# Altium PCB H-bridge.PcbDoc
Units mil, origin at the board's own origin, x right, y up, seen from the top; angles counter-clockwise.
Board outline 1715 x 2495 mil, 2 copper layers (Top Layer, Bottom Layer); 49 components, 26 nets, 126 pads, 356 vias.
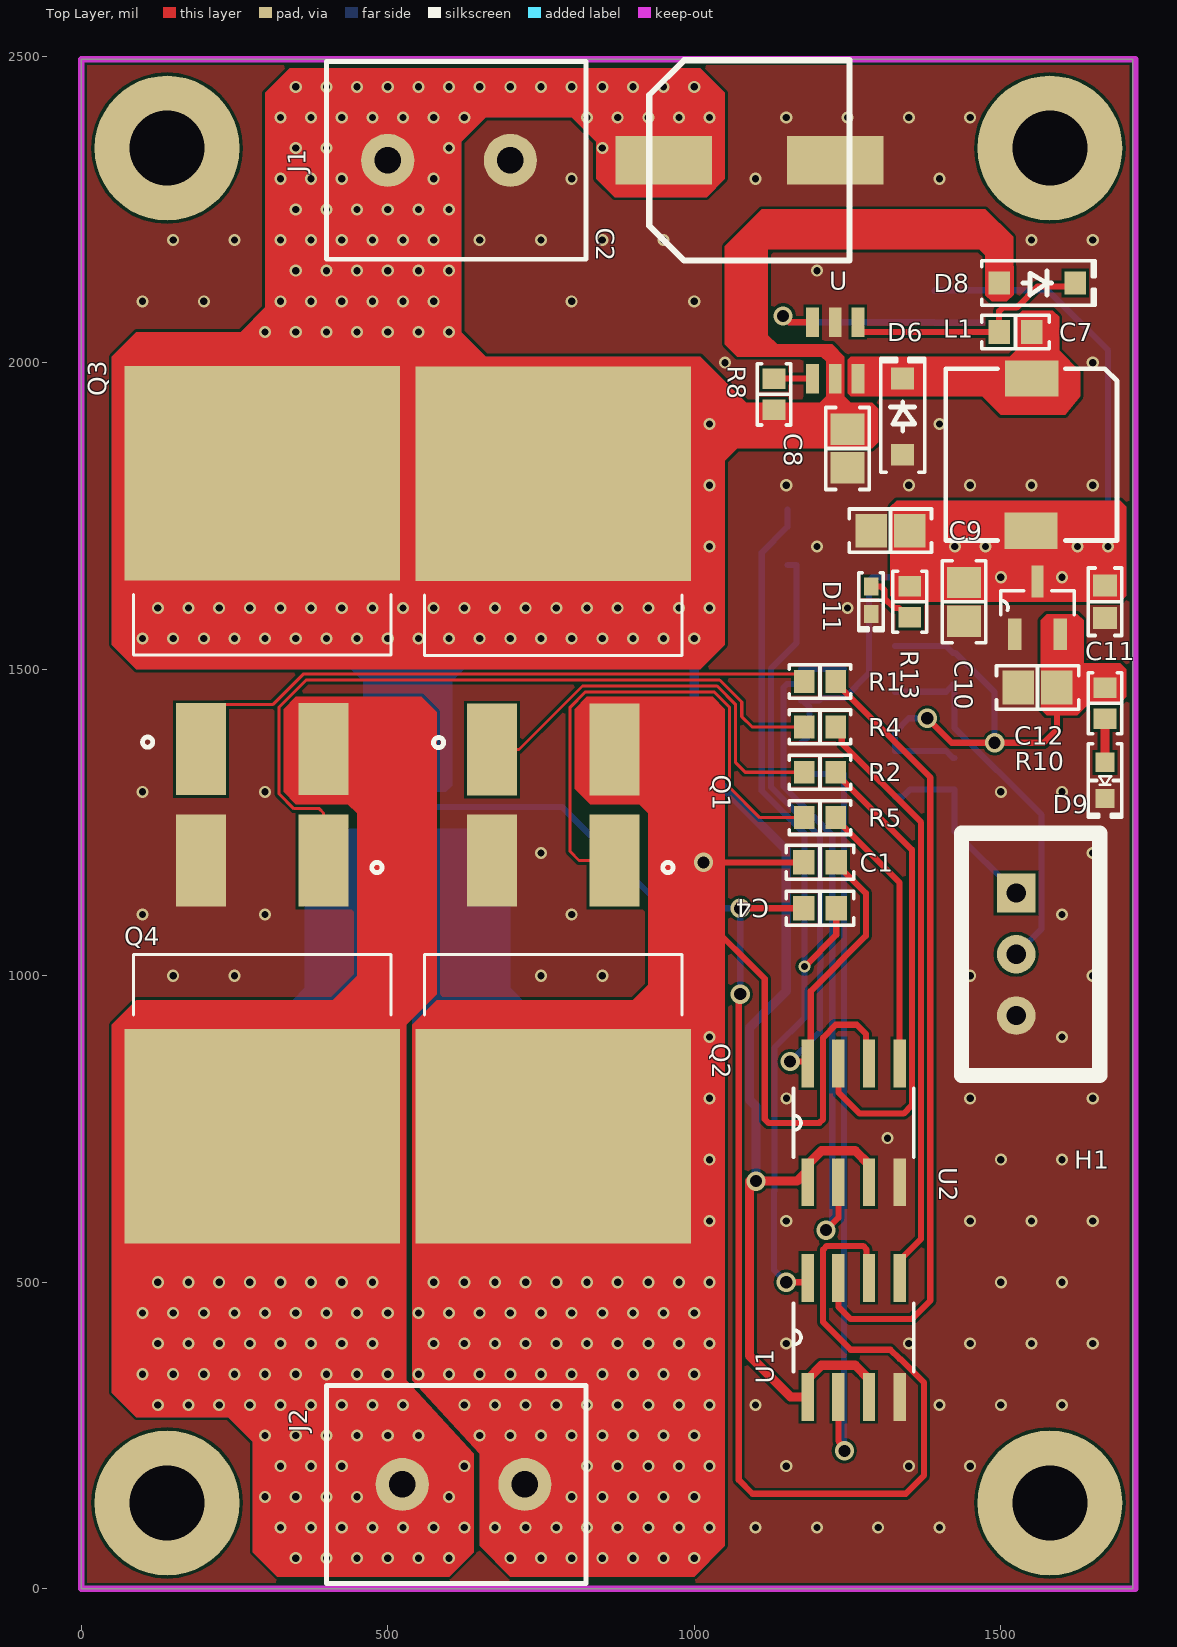
[diagram p0: Top Layer view]
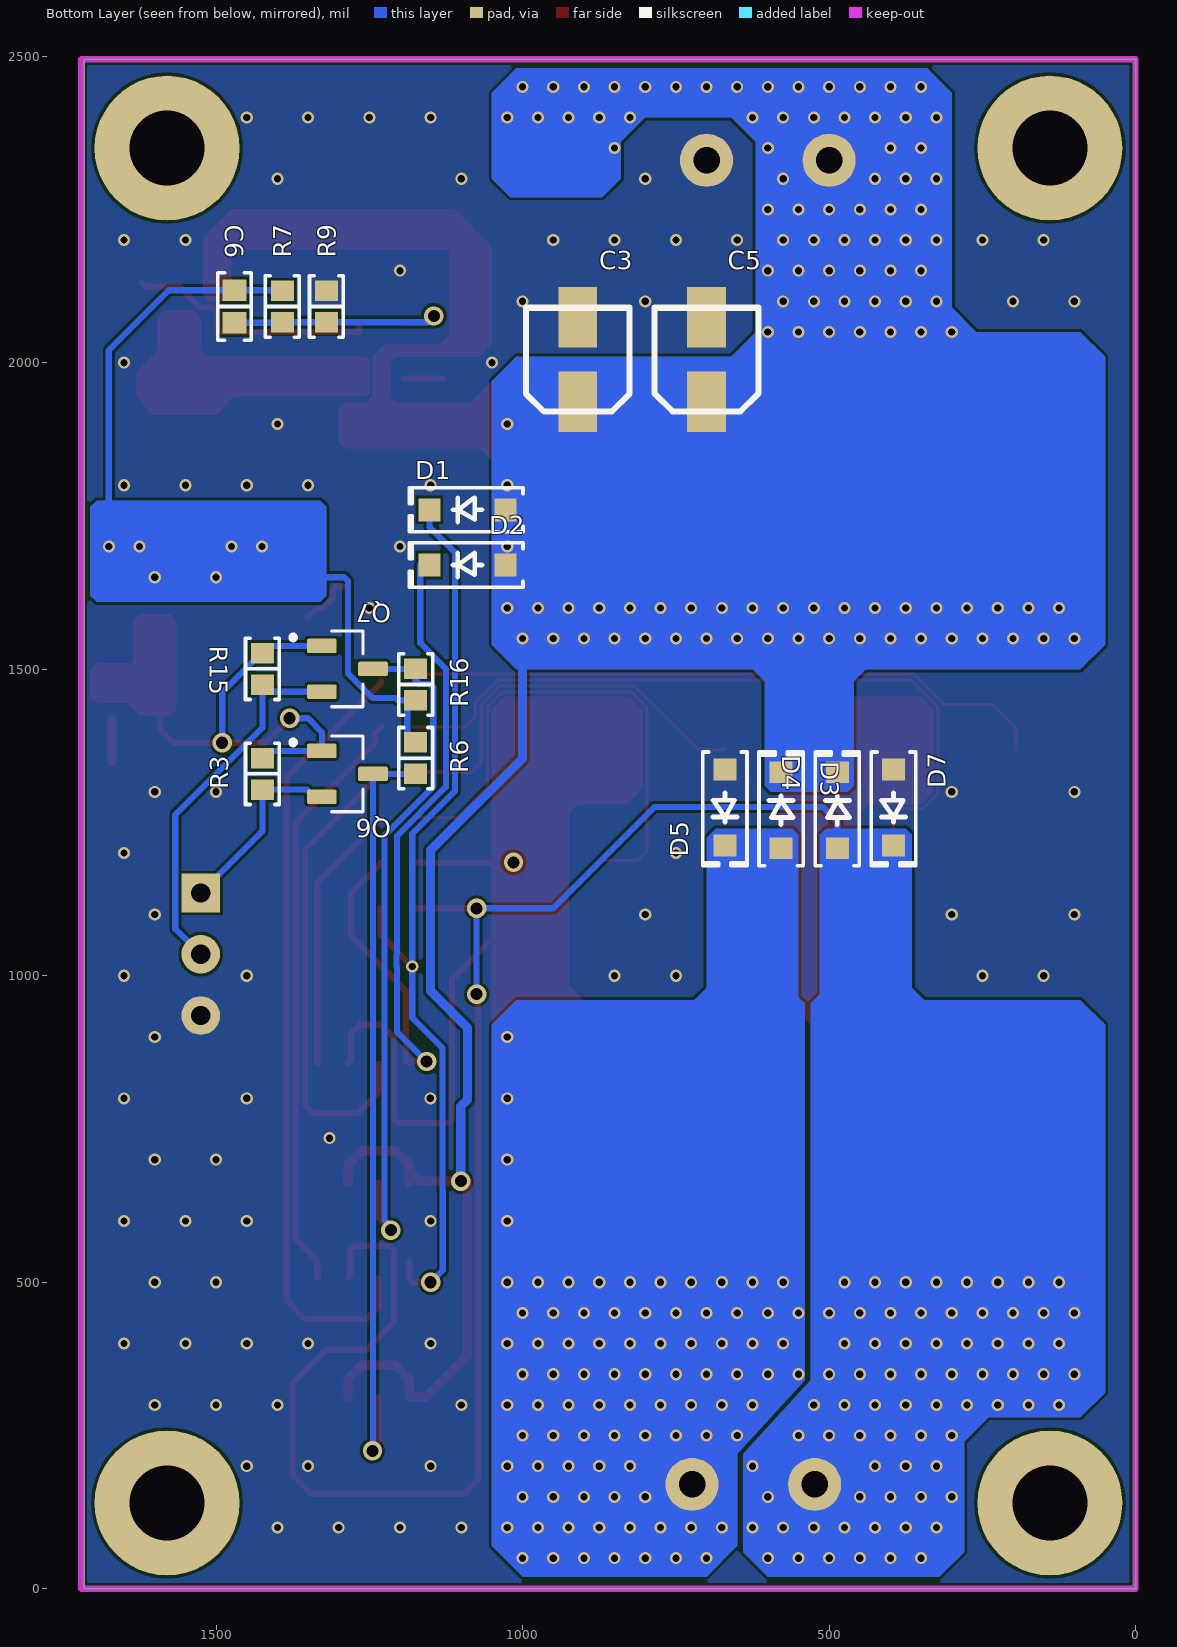
[diagram p1: Bottom Layer view, seen from below]
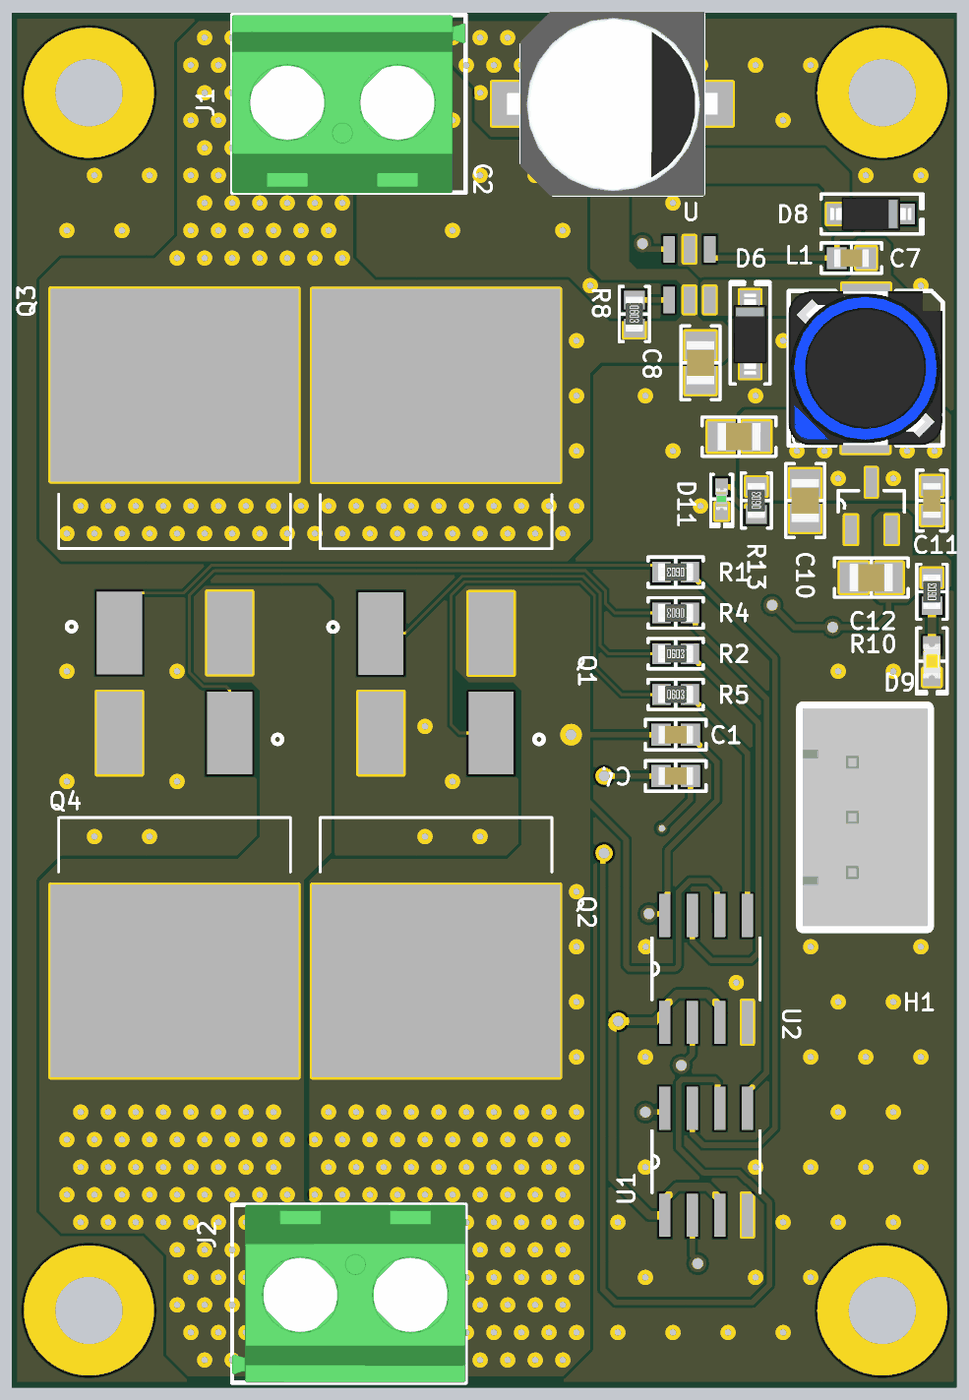
[diagram p2: 3D render of the assembled board from above, using the file's embedded part models]
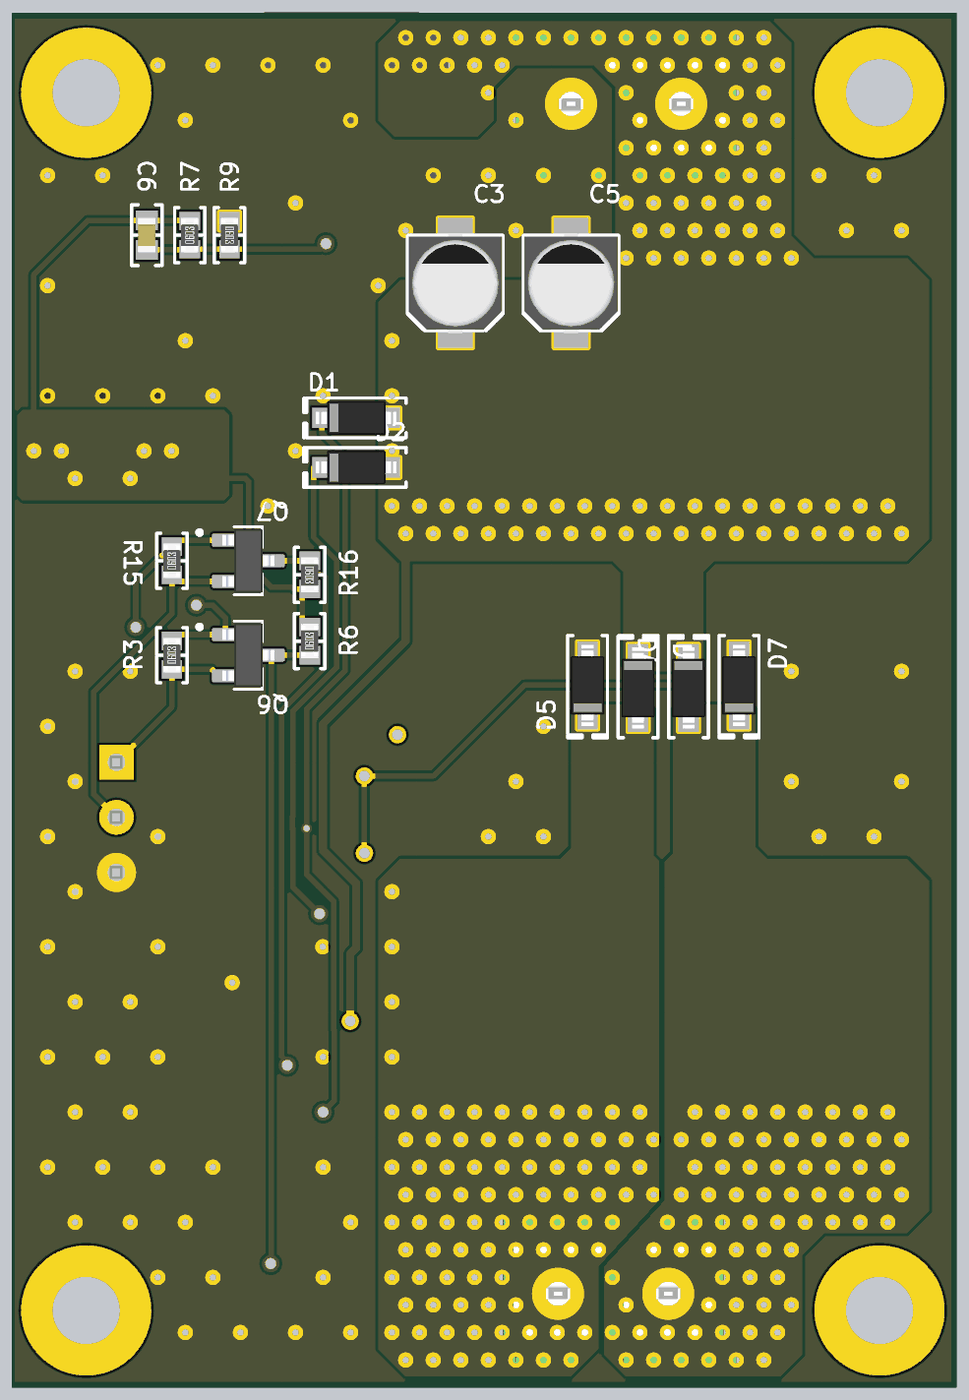
[diagram p3: 3D render of the assembled board from below, using the file's embedded part models]

## Layer stack, top to bottom
Top Solder: solder mask 0.4, Solder Resist, Dk 3.5
Top Layer: signal copper 1.4
Dielectric 1: dielectric 12.6, FR-4, Dk 4.8
Bottom Layer: signal copper 1.4
Bottom Solder: solder mask 0.4, Solder Resist, Dk 3.5

## Board outline
0,0 0,2495 1715,2495 1715,0

## Design rules (kind name [scope] priority, off if disabled: settings)
Clearance [All] p1: gap=5 ignorepadtopadclearanceinfootprint=FALSE
PolygonConnect PolygonConnect_1 [All vs IsNamedPolygon('GND_L01_P000') Or IsNamedPolygon('GND_L02_P001')] p1: connectstyle=Direct reliefconductorwidth=10 reliefentries=4 polygonreliefangle="90 Angle" airgapwidth=10
PolygonConnect [All] p2: connectstyle=Relief reliefconductorwidth=10 reliefentries=4 polygonreliefangle="90 Angle" airgapwidth=10
RoutingVias [All] p1: holewidth=11.81 width=19.68 viastyle="Through Hole" minholewidth=11.81 minwidth=19.68 maxholewidth=19.68 maxwidth=31.5
SolderMaskExpansion [All] p1: expansion=4 istentingtop=FALSE
Width [All] p1: maxlimit=50 minlimit=5 preferedwidth=10 minimp=50.000000 maximp=50.000000 favimp=50.000000
30 further rules are at their usual default settings.

## Classes and differential pairs
component class Power: C6 C7 C8 C9 C10 C11 C12 D6 D8 D9 D11 L1 R7 R8 R9 R10 R13 U
component class H_Bridge_Mosate: A C1 C2 C3 C4 C5 D1 D2 D3 D4 D5 D7 H1 J1 J2 Q1 Q2 Q3 Q4 Q6 Q7 R1 R2 R3 R4 R5 R6 R15 R16 U1 U2

## Components (designator, comment, footprint, x,y, rotation, side; value= is the part's Value field where it differs from the comment)
C1 "1 µF" "CAP 0603_1608" 1205,1185 r0 top
C2 "220uF" "tu nhom 8 (f)" 1090,2330 r0 top
C3 "4.7uF" "tu nhom 4 (b)" 910,2005 r90 bottom
C4 "1 µF" "CAP 0603_1608" 1205,1110 r0 top
C5 "4.7uF" "tu nhom 4 (b)" 700,2005 r90 bottom
C6 "10000 pF" "CAP 0603_1608" 1470,2091.59 r90 bottom
C7 "10000 pF" "CAP 0603_1608" 1523.92,2050 r180 top
C8 "10 µF" "CAP 0805_2012" 1250,1860 r90 top
C9 "22 µF" "CAP 0805_2012" 1320,1725.97 r0 top
C10 "10 µF" "CAP 0805_2012" 1440,1610 r90 top
C11 "0.1µF" "CAP 0603_1608" 1670,1610 r90 top
C12 "10 µF" "CAP 0805_2012" 1559.95,1470 r0 top
D1 "1N5819HW-7-F" SOD-123 1090,1760 r0 bottom
D2 "1N5819HW-7-F" SOD-123 1090,1670 r0 bottom
D3 "1N5819HW-7-F" SOD-123 578.33,1270 r90 bottom
D4 "1N5819HW-7-F" SOD-123 486.67,1270 r90 bottom
D5 "1N5819HW-7-F" SOD-123 670,1274.45 r270 bottom
D6 "1N5819HW-7-F" SOD-123 1340,1911.99 r90 top
D7 "1N5819HW-7-F" SOD-123 395,1274.45 r270 bottom
D8 "1N5819HW-7-F" SOD-123 1559.35,2130 r0 top
D9 "Yellow" "LED 0603_1608 YELLOW" 1670,1318.49 r270 top
D11 "Green" "LED 0402_1005 GREEN" 1288.5,1612.5 r270 top
H1 "Header 3P 2.54 Duc Thang" XH2.54M-3 1525,1135 r270 top
J1 "282837-2" "TE 282837-2" 600,2330 r0 top
J2 "282837-2" "TE 282837-2" 623.61,170.28 r180 top
L1 "10µH" "TDK SLF7032" 1550,1849.98 r270 top
Q1 "IRF3205SPBF" TRANS_IRF3205SPBF 770,1650 r0 top
Q2 "IRF3205SPBF" TRANS_IRF3205SPBF 770,906.84 r180 top
Q3 "IRF3205SPBF" TRANS_IRF3205SPBF 295.37,1650.73 r0 top
Q4 "IRF3205SPBF" TRANS_IRF3205SPBF 295.37,906.84 r180 top
Q6 "BSS138" SOT95P240X111-3N 1285.73,1329.31 r180 bottom
Q7 "BSS138" SOT95P240X111-3N 1285.73,1500.59 r180 bottom
R1 "10 Ohms" "RES 0603_1608" 1205,1480 r180 top
R2 "10 Ohms" "RES 0603_1608" 1205,1331.96 r0 top
R3 "10 kOhms" "RES 0603_1608" 1424.38,1329.31 r90 bottom
R4 "10 Ohms" "RES 0603_1608" 1205,1405.98 r180 top
R5 "10 Ohms" "RES 0603_1608" 1205,1257.94 r0 top
R6 "10 kOhms" "RES 0603_1608" 1174.38,1354.9 r90 bottom
R7 "52.3 kOhms" "RES 0603_1608" 1392,2091.59 r90 bottom
R8 "100 kOhms" "RES 0603_1608" 1130,1948.41 r270 top
R9 "10 kOhms" "RES 0603_1608" 1320,2091.59 r270 bottom
R10 "680 Ohms" "RES 0603_1608" 1670,1444.41 r90 top
R13 "1 kOhms" "RES 0603_1608" 1351.5,1610 r90 top
R15 "10 kOhms" "RES 0603_1608" 1424.38,1500.59 r90 bottom
R16 "10 kOhms" "RES 0603_1608" 1174.38,1475 r270 bottom
U "LM2734YMK" SOT95P285X100-6N 1230,2020 r270 top
U1 "IR2104SPBF" SOIC127P600X175-8N 1260,410 r90 top
U2 "IR2104SPBF" SOIC127P600X175-8N 1260,760 r90 top
? "MCP1700T-3302E/TT" SOT95P237X112-3N 1560,1600 r90 top

## Footprints (in the part's own frame and the unit in brackets; to place one, negate y for a bottom-side part, rotate by r counter-clockwise, add the part's x,y. Pads: shape width x height; smd on the part's side, far side on the other; paste and mask are expansions set on the pad)
"CAP 0603_1608" [mm] "Chip Capacitor, 2-Leads, Body 1.60x0.80mm, IPC Medium Density"
  rect 0.9x1 smd: 1(-0.675,0) 2(0.675,0)
  silkscreen extent -1.4,-0.7 1.4,0.7, body extent -0.8,-0.41 0.8,0.41, height 0.82
"CAP 0805_2012" [mm] "Chip Capacitor, 2-Leads, Body 2.00x1.20mm, IPC Medium Density"
  rect 1.3x1.4 smd: 1(-0.8,0) 2(0.8,0)
  silkscreen extent -1.7,-0.9 1.7,0.9, body extent -1,-0.64 1,0.64, height 1.26
"LED 0402_1005 GREEN" [mm] "Chip Diode, 2-Leads, Body 1.00x0.50mm, IPC Medium Density"
  rect 0.75x0.6 smd: 1(-0.575,0) 2(0.575,0)
  silkscreen extent -1.14,-0.51 1.27,0.51, body extent -0.5,-0.25 0.5,0.25, height 0.21
"LED 0603_1608 YELLOW" [mm] "Chip Diode, 2-Leads, Body 1.60x0.80mm, IPC Medium Density"
  rect 0.8x0.8 smd: 1(-0.75,0) 2(0.75,0)
  silkscreen extent -1.52,-0.7 1.52,0.7, body extent -0.8,-0.4 0.8,0.4, height 0.53
"RES 0603_1608" [mm] "Chip Resistor, 2-Leads, Body 1.60x0.80mm, IPC Medium Density"
  rect 0.85x0.95 smd: 1(-0.65,0) 2(0.65,0)
  silkscreen extent -1.27,-0.7 1.27,0.7, body extent -0.8,-0.4 0.8,0.4, height 0.45
SOD-123 [mm] "SOD, 2-Leads, Body 1.55x3.70mm, IPC Medium Density"
  rect 0.9x0.95 smd: 1(-1.575,0) 2(1.575,0)
  silkscreen extent -2.3,-0.92 2.41,0.92, body extent -1.86,-0.78 1.86,0.77, height 1.35
SOIC127P600X175-8N [mil]
  rect 78x20 smd: 1(-97,75) 2(-97,25) 3(-97,-25) 4(-97,-75) 5(97,-75) 6(97,-25) 7(97,25) 8(97,75)
  silkscreen extent -56,-98 56,98
SOT95P237X112-3N [mil]
  rect 52x22 smd: 1(-43,37) 2(-43,-37)
  rect 52x20 smd: 3(43,0)
  silkscreen extent -11,-60 28,60
SOT95P240X111-3N [mm]
  rrect25% 1.23x0.6 smd: 1(-1.06,0.95) 2(-1.06,-0.95) 3(1.06,0)
  silkscreen extent -2.35,-1.57 0.65,1.57, body extent -1.2,-1.46 1.2,1.46, height 1.2
SOT95P285X100-6N [mil]
  rect 48x21 smd: 1(-46,37) 2(-46,0) 3(-46,-37) 4(46,-37) 5(46,0) 6(46,37)
"TDK SLF7032" [mm] "Power Inductor, 2-Leads, TDK, SLF7032T-221MR29-2PF"
  rect 1.5x2.2 smd: 1(-3.15,0.012) 2(3.15,-0.012)
  silkscreen extent -3.56,-3.55 3.56,3.55, body extent -3.56,-3.56 3.56,3.54, height 3.39
"TE 282837-2" [mm] "Wire to Board Terminal Block Horizontal with Board, 2 Postions, Body 10.76x8.2 mm, Pitch 5.08mm"
  round 2.2 hole 1.1: 1(-2.54,0) 2(2.54,0)
  silkscreen extent -5.08,-4.1 5.68,4.1, body extent -5.08,-4.1 5.68,4.1, height 10.3
TRANS_IRF3205SPBF [mil]
  rect 81.89x150 smd: 1(-100,-281.1) 3(100,-281.1)
  rect 450x350 smd: 2(0,168.9)
  silkscreen extent -210,-278 210,-29
"tu nhom 4 (b)" [mm]
  rect 2.5x1.6 smd: 1(-1.75,0) 2(1.75,0)
  silkscreen extent -2.15,-2.15 2.15,2.15, body extent -2.31,-2.15 2.29,2.15, height 3.91
"tu nhom 8 (f)" [mm]
  rect 4x2 smd: 1(-3.55,0) 2(3.55,0)
  silkscreen extent -4.15,-4.15 4.15,4.15, body extent -4.85,-4.25 4.85,4.25, height 10.5
XH2.54M-3 [mm]
  rect 1.6x1.6 hole 0.8: 1(0,0)
  round 1.6 hole 0.8: 2(2.54,0) 3(5.08,0)
  silkscreen extent -2.48,-2.26 7.56,3.46, body extent -2.48,-2.26 7.56,3.48, height 6.91

## Part data
C1 C4: library part GCG188L8EE105KA07D, "CAP CER 1UF 16V X8L 0603", Device Package="0603 (1608 Metric)", Manufacturer="Murata Electronics", Operating Temperature="-55°C ~ 150°C", Ratings=AEC-Q200, Supplier Part Number 1=490-GCG188L8EE105KA07DCT-ND, Temperature Coefficient=X8L, Tolerance=±10%, Voltage - Rated=16V, Applications=Automotive, Capacitance="1 µF", componentlink2description="DigiKey Link", componentlink2url=https://www.digikey.com/en/products/detail/murata-electronics/GCG188L8EE105KA07D/10695125, Features="Epoxy Mountable", lastupdated="2/9/2024 8:09:54 PM", Lifecycle Status=Active, Minimum Order=1, Mounting Type="Surface Mount, MLCC", Package / Case="0603 (1608 Metric)", packaging=TapeAndReel, Part Number=GCG188L8EE105KA07D, Part Status=Active, partid=46174, Price=0.04, series=GCG, Size / Dimension="0.063\" L x 0.031\" W (1.60mm x 0.80mm)", Supplier 1=DigiKey, Thickness (Max)="0.035\" (0.90mm)"
C2: library part "Tu Nhom 220uF 25V", "Dán", Chung_Loai=Dán, Don_Vi=Con, Ma_Hang=MH002221, So_Chan=2, Ten_Linh_Kien="Tụ Nhôm 220uF 25V"
C3 C5: library part "Tu Nhom 4.7uF 25V", "Dán", Chung_Loai=Dán, Don_Vi=Con, Ma_Hang=MH003790, So_Chan=2, Ten_Linh_Kien="Tụ Nhôm 4.7uF 25V 4x4.5MM"
C6 C7: library part C0603C103K4RECAUTO, "CAP CER 0603 10NF 16V X7R 10%", Device Package="0603 (1608 Metric)", Manufacturer=KEMET, Operating Temperature="-55°C ~ 125°C", Ratings=AEC-Q200, Supplier Part Number 1=399-17880-1-ND, Temperature Coefficient=X7R, Tolerance=±10%, Voltage - Rated=16V, Applications="Automotive, ESD Protection", Capacitance="10000 pF", componentlink1description=Datasheet, componentlink1url=https://api.kemet.com/component-edge/download/datasheet/C0603C103K4RECAUTO.pdf, componentlink2description="DigiKey Link", componentlink2url=https://www.digikey.com/en/products/detail/kemet/C0603C103K4RECAUTO/8640474, lastupdated="2/9/2024 8:10:22 PM", Lifecycle Status=Active, Minimum Order=1, Mounting Type="Surface Mount, MLCC", Package / Case="0603 (1608 Metric)", packaging=TapeAndReel, Part Number=C0603C103K4RECAUTO, Part Status=Active, partid=8251, Price=0.01, series="ESD SMD Auto X7R", Size / Dimension="0.063\" L x 0.031\" W (1.60mm x 0.80mm)", Supplier 1=DigiKey, Thickness (Max)="0.034\" (0.87mm)"
C8: library part CL21X106KAYNNNE, "CAP CER 10UF 25V X6S 0805", Device Package="0805 (2012 Metric)", Manufacturer="Samsung Electro-Mechanics", Operating Temperature="-55°C ~ 105°C", Supplier Part Number 1=1276-6698-1-ND, Temperature Coefficient=X6S, Tolerance=±10%, Voltage - Rated=25V, Applications="General Purpose", Capacitance="10 µF", componentlink1description=Datasheet, componentlink1url=http://www.samsungsem.com/kr/support/product-search/mlcc/CL21X106KAYNNNE.jsp, componentlink2description="DigiKey Link", componentlink2url=https://www.digikey.com/en/products/detail/samsung-electro-mechanics/CL21X106KAYNNNE/5961182, lastupdated="2/9/2024 8:16:03 PM", Lifecycle Status=Active, Minimum Order=1, Mounting Type="Surface Mount, MLCC", Package / Case="0805 (2012 Metric)", packaging=TapeAndReel, Part Number=CL21X106KAYNNNE, Part Status=Active, partid=4781, Price=0.04, series=CL, Size / Dimension="0.079\" L x 0.049\" W (2.00mm x 1.25mm)", Supplier 1=DigiKey, Thickness (Max)="0.057\" (1.45mm)"
C9: library part CL21A226KQQNNNE, "CAP CER 22UF 6.3V X5R 0805", Device Package="0805 (2012 Metric)", Manufacturer="Samsung Electro-Mechanics", Operating Temperature="-55°C ~ 85°C", Supplier Part Number 1=1276-2907-1-ND, Temperature Coefficient=X5R, Tolerance=±10%, Voltage - Rated=6.3V, Applications="General Purpose", Capacitance="22 µF", componentlink1description=Datasheet, componentlink1url=http://www.samsungsem.com/kr/support/product-search/mlcc/CL21A226KQQNNNE.jsp, componentlink2description="DigiKey Link", componentlink2url=https://www.digikey.com/en/products/detail/samsung-electro-mechanics/CL21A226KQQNNNE/3888565, lastupdated="2/9/2024 8:16:07 PM", Lifecycle Status=Active, Minimum Order=1, Mounting Type="Surface Mount, MLCC", Package / Case="0805 (2012 Metric)", packaging=TapeAndReel, Part Number=CL21A226KQQNNNE, Part Status=Active, partid=3051, Price=0.03, series=CL, Size / Dimension="0.079\" L x 0.049\" W (2.00mm x 1.25mm)", Supplier 1=DigiKey, Thickness (Max)="0.055\" (1.40mm)"
C10 C12: library part C2012X6S1C106K125AC, "CAP CER 10UF 16V X6S 0805", Device Package="0805 (2012 Metric)", Manufacturer="TDK Corporation", Operating Temperature="-55°C ~ 105°C", Supplier Part Number 1=445-7611-1-ND, Temperature Coefficient=X6S, Tolerance=±10%, Voltage - Rated=16V, Applications="General Purpose", Capacitance="10 µF", componentlink1description=Datasheet, componentlink1url=https://product.tdk.com/info/en/catalog/datasheets/mlcc_commercial_general_en.pdf?ref_disty=digikey, componentlink2description="DigiKey Link", componentlink2url=https://www.digikey.com/en/products/detail/tdk-corporation/C2012X6S1C106K125AC/2733046, Features="Low ESL", lastupdated="2/9/2024 8:16:08 PM", Lifecycle Status=Active, Minimum Order=1, Mounting Type="Surface Mount, MLCC", Package / Case="0805 (2012 Metric)", packaging=TapeAndReel, Part Number=C2012X6S1C106K125AC, Part Status=Active, partid=2995, Price=0.06, series=C, Size / Dimension="0.079\" L x 0.049\" W (2.00mm x 1.25mm)", Supplier 1=DigiKey, Thickness (Max)="0.057\" (1.45mm)"
C11: library part 0603YC104K4T4A, "CAP CER 0.1UF 16V X7R 0603", Device Package="0603 (1608 Metric)", Manufacturer="AVX Corporation", Operating Temperature="-55°C ~ 125°C", Ratings=AEC-Q200, Supplier Part Number 1=478-9382-1-ND, Temperature Coefficient=X7R, Tolerance=±10%, Voltage - Rated=16V, Applications=Automotive, Capacitance=0.1µF, componentlink1description=Datasheet, componentlink1url=http://datasheets.avx.com/AutoMLCC.pdf, componentlink2description="DigiKey Link", componentlink2url=http://digikey.com/product-detail/en/avx-corporation/0603YC104K4T4A/478-9382-1-ND/4901449, lastupdated="9/2/2020 1:03:04 AM", Lifecycle Status=Active, Minimum Order=1, Mounting Type="Surface Mount, MLCC", Package / Case="0603 (1608 Metric)", packaging=TapeAndReel, Part Number=0603YC104K4T4A, Part Status=Active, partid=17140, Price=0.02, series=-, Size / Dimension="0.063\" L x 0.032\" W (1.60mm x 0.81mm)", Supplier 1=DigiKey, Thickness (Max)="0.035\" (0.90mm)"
D1 D2 D3 D4 D5 D6 D7 D8: "DIODE SCHOTTKY 40V 1A SOD123", Capacitance @ Vr, F="60pF @ 4V, 1MHz", Current - Average Rectified (Io)=1A, Current - Reverse Leakage @ Vr="1 mA @ 40 V", Manufacturer="Diodes Incorporated", Operating Temperature - Junction="-65°C ~ 125°C", Package / Case=SOD-123, Supplier Part Number 1=1N5819HW-FDICT-ND, Voltage - DC Reverse (Vr) (Max)="40 V", Voltage - Forward (Vf) (Max) @ If="450 mV @ 1 A", componentlink1description=Datasheet, componentlink1url=https://www.diodes.com/assets/Datasheets/ds30217.pdf, componentlink2description="DigiKey Link", componentlink2url=https://www.digikey.com/en/products/detail/diodes-incorporated/1N5819HW-7-F/814970, Diode Type=Schottky, lastupdated="6/3/2024 7:54:46 PM", Lifecycle Status=Active, Minimum Order=1, Mounting Type="Surface Mount", packaging=TapeAndReel, Part Number=1N5819HW-7-F, Part Status=Active, partid=2212, Price=0.05, series=-, Speed="Fast Recovery =< 500ns, > 200mA (Io)", Supplier 1=DigiKey, Supplier Device Package=SOD-123
D9: library part IN-S63AT5Y, "LED YELLOW CLEAR 0603 SMD", Current - Test=5mA, Device Package="0603 (1608 Metric)", Lens Color=Clear, Manufacturer=Inolux, Millicandela Rating=35mcd, Supplier Device Package=0603, Supplier Part Number 1=1830-1066-1-ND, Voltage - Forward (Vf) (Typ)=2V, Color=Yellow, componentlink1description=Datasheet, componentlink1url=http://www.inolux-corp.com/datasheet/SMDLED/Mono%20Color%20Top%20View/IN-S63AT%20Series_V1.1.pdf, componentlink2description="DigiKey Link", componentlink2url=https://www.digikey.com/en/products/detail/inolux/IN-S63AT5Y/7604932, Configuration=Standard, Height (Max)=0.40mm, lastupdated="6/3/2024 8:01:09 PM", Lens Size="1.15mm x 0.80mm", Lens Style="Rectangle with Flat Top", Lens Transparency=Clear, Lifecycle Status=Active, Minimum Order=1, Mounting Type="Surface Mount", Package / Case="0603 (1608 Metric)", packaging=TapeAndReel, Part Number=IN-S63AT5Y, Part Status=Active, partid=143, Price=0.03, series=IN-S63AT, Size / Dimension="1.60mm L x 0.80mm W", Supplier 1=DigiKey, Viewing Angle=120°, Wavelength - Dominant=589nm, Wavelength - Peak=593nm
D11: library part QBLP595-AG15-2897, "LED GREEN CLEAR 0402 SMD", Current - Test=5mA, Device Package="0402 (1005 Metric)", Lens Color=Colorless, Manufacturer="QT Brightek (QTB)", Millicandela Rating=16.5mcd, Supplier Device Package=0402, Supplier Part Number 1=1516-QBLP595-AG15-2897CT-ND, Voltage - Forward (Vf) (Typ)=1.9V, Color=Green, componentlink1description=Datasheet, componentlink1url=https://www.qt-brightek.com/datasheet/QBLP595-AG15-2897.pdf, componentlink2description="DigiKey Link", componentlink2url=https://www.digikey.com/en/products/detail/qt-brightek-qtb/QBLP595-AG15-2897/17049386, Configuration=Standard, Height (Max)=0.60mm, lastupdated="6/3/2024 7:58:13 PM", Lens Size="0.70mm x 0.50mm", Lens Style="Rectangle with Flat Top", Lens Transparency=Clear, Lifecycle Status=Active, Minimum Order=1, Mounting Type="Surface Mount", Package / Case="0402 (1005 Metric)", packaging=TapeAndReel, Part Number=QBLP595-AG15-2897, Part Status=Active, partid=1262, Price=0.04, series=QBLP595, Size / Dimension="1.00mm L x 0.50mm W", Supplier 1=DigiKey, Viewing Angle=140°, Wavelength - Dominant=570nm
H1: "Cắm", Chung_Loai=Cắm, Don_Vi=Con, Ma_Hang=MH001292, Ten_Linh_Kien="Header 3P XH2.54-3P Đực Thẳng"
J1 J2: "TERM BLK 2P SIDE ENT 5.08MM PCB", Color=Green, Current="13.5 A", Manufacturer="TE Connectivity AMP Connectors", Supplier Part Number 1=A113320-ND, Voltage="300 V", componentlink1description=Datasheet, componentlink1url=https://www.te.com/commerce/DocumentDelivery/DDEController?Action=srchrtrv&DocNm=282837&DocType=Customer+Drawing&DocLang=English, componentlink2description="DigiKey Link", componentlink2url=https://www.digikey.com/en/products/detail/te-connectivity-amp-connectors/282837-2/2187973, Features="Interlocking (Side)", lastupdated="6/21/2022 3:00:23 PM", Lifecycle Status=Active, Mating Orientation="Horizontal with Board", Minimum Order=1, Mounting Type="Through Hole", Number of Levels=1, packaging=Tray, Part Number=282837-2, Part Status=Active, Pitch="0.200\" (5.08mm)", Positions Per Level=2, Price=0.31, series=Buchanan, Supplier 1=DigiKey, Wire Gauge="16-28 AWG", Wire Termination="Screw - Rising Cage Clamp"
L1: library part SLF7032T-100M1R4-2PF, "FIXED IND 10UH 1.4A 63.6 MOHM", Current Rating (Amps)=1.4A, DC Resistance (DCR)="63.6mOhm Max", Device Package=Nonstandard, Inductance Frequency - Test=100kHz, Manufacturer="TDK Corporation", Operating Temperature="-40°C ~ 105°C", Supplier Part Number 1=445-1998-1-ND, Tolerance=±20%, componentlink1description=Datasheet, componentlink1url=//media.digikey.com/pdf/Data%20Sheets/TDK%20PDFs/SLF7032_Type.pdf, componentlink2description="DigiKey Link", componentlink2url=http://digikey.com/product-detail/en/tdk-corporation/SLF7032T-100M1R4-2PF/445-1998-1-ND/755405, Height - Seated (Max)="0.134\" (3.40mm)", Inductance=10µH, lastupdated="9/2/2020 1:30:24 AM", Lifecycle Status=Active, Material - Core=Ferrite, Minimum Order=1, Mounting Type="Surface Mount", Package / Case=Nonstandard, packaging=TapeAndReel, Part Number=SLF7032T-100M1R4-2PF, Part Status=Active, partid=3677, Price=0.43, series=SLF, Shielding=Shielded, Size / Dimension="0.276\" L x 0.276\" W (7.00mm x 7.00mm)", Supplier 1=DigiKey, Type=Wirewound
Q1 Q2 Q3 Q4: "RoHS Compliant", Package="D2PAK Infineon", Availability=Unavailable, MF="Infineon Technologies", MP=IRF3205SPBF, Price=None, SnapEDA_Link=https://www.snapeda.com/parts/IRF3205SPBF/Infineon%20Technologies/view-part/576468/?ref=snap
Q6 Q7: "N-Channel 50 V 220mA (Ta) 350mW (Ta) Surface Mount SOT-23-3", Package="SOT-23-3 Motorola", Check_prices=https://www.snapeda.com/parts/BSS138/Onsemi/view-part/?ref=eda, MF=onsemi, MP=BSS138, SnapEDA_Link=https://www.snapeda.com/parts/BSS138/Onsemi/view-part/?ref=snap
R1 R2 R4 R5: library part ERJ-UP3F10R0V, "RES 10 OHM 1% 1/4W 0603", Device Package="0603 (1608 Metric)", Manufacturer="Panasonic Electronic Components", Operating Temperature="-55°C ~ 155°C", Power (Watts)="0.25W, 1/4W", Ratings=AEC-Q200, Supplier Device Package=0603, Supplier Part Number 1=10-ERJ-UP3F10R0VCT-ND, Temperature Coefficient=±100ppm/°C, Tolerance=±1%, componentlink1description=Datasheet, componentlink1url=https://b2b-api.panasonic.eu/file_stream/pids/fileversion/4484, componentlink2description="DigiKey Link", componentlink2url=https://www.digikey.com/en/products/detail/panasonic-electronic-components/ERJ-UP3F10R0V/12092098, Composition="Thick Film", Features="Anti-Sulfur, Automotive AEC-Q200, Pulse Withstanding", Height - Seated (Max)="0.022\" (0.55mm)", lastupdated="2/9/2024 8:41:13 PM", Lifecycle Status=Active, Minimum Order=1, Number of Terminations=2, Package / Case="0603 (1608 Metric)", packaging=TapeAndReel, Part Number=ERJ-UP3F10R0V, Part Status=Active, partid=66744, Price=0.02, Resistance="10 Ohms", series=ERJ-UP3, Size / Dimension="0.063\" L x 0.031\" W (1.60mm x 0.80mm)", Supplier 1=DigiKey
R3 R6 R15 R16: library part AC0603FR-0710KL, "RES SMD 10K OHM 1% 1/10W 0603", Device Package="0603 (1608 Metric)", Manufacturer=Yageo, Operating Temperature="-55°C ~ 155°C", Power (Watts)="0.1W, 1/10W", Ratings=AEC-Q200, Supplier Device Package=0603, Supplier Part Number 1=311-10KLDCT-ND, Temperature Coefficient=±100ppm/°C, Tolerance=±1%, componentlink1description=Datasheet, componentlink1url=https://www.yageo.com/upload/media/product/productsearch/datasheet/rchip/PYu-AC_51_RoHS_L_7.pdf, componentlink2description="DigiKey Link", componentlink2url=https://www.digikey.com/en/products/detail/yageo/AC0603FR-0710KL/2827814, Composition="Thick Film", Features="Automotive AEC-Q200, Moisture Resistant", Height - Seated (Max)="0.022\" (0.55mm)", lastupdated="2/9/2024 8:42:48 PM", Lifecycle Status=Active, Minimum Order=1, Number of Terminations=2, Package / Case="0603 (1608 Metric)", packaging=CutTape, Part Number=AC0603FR-0710KL, Part Status=Active, partid=17347, Price=0.01, Resistance="10 kOhms", series=AC, Size / Dimension="0.063\" L x 0.031\" W (1.60mm x 0.80mm)", Supplier 1=DigiKey
R7: library part ERA-3AEB5232V, "RES SMD 52.3KOHM 0.1% 1/10W 0603", Device Package="0603 (1608 Metric)", Manufacturer="Panasonic Electronic Components", Operating Temperature="-55°C ~ 155°C", Power (Watts)="0.1W, 1/10W", Ratings=AEC-Q200, Supplier Device Package=0603, Supplier Part Number 1=P52.3KDBCT-ND, Temperature Coefficient=±25ppm/°C, Tolerance=±0.1%, componentlink1description=Datasheet, componentlink1url=https://industrial.panasonic.com/cdbs/www-data/pdf/RDM0000/AOA0000C307.pdf, componentlink2description="DigiKey Link", componentlink2url=https://www.digikey.com/en/products/detail/panasonic-electronic-components/ERA-3AEB5232V/2026903, Composition="Thin Film", Features="Automotive AEC-Q200", Height - Seated (Max)="0.022\" (0.55mm)", lastupdated="2/9/2024 8:42:09 PM", Lifecycle Status=Active, Minimum Order=1, Number of Terminations=2, Package / Case="0603 (1608 Metric)", packaging=TapeAndReel, Part Number=ERA-3AEB5232V, Part Status=Active, partid=24659, Price=0.03, Resistance="52.3 kOhms", series=ERA-3A, Size / Dimension="0.063\" L x 0.031\" W (1.60mm x 0.80mm)", Supplier 1=DigiKey
R8: library part RCA0603100KJNEA, "RES SMD 100K OHM 5% 1/10W 0603", Device Package="0603 (1608 Metric)", Manufacturer="Vishay Dale", Operating Temperature="-55°C ~ 155°C", Power (Watts)="0.1W, 1/10W", Ratings=AEC-Q200, Supplier Device Package=0603, Supplier Part Number 1=541-2215-1-ND, Temperature Coefficient=±200ppm/°C, Tolerance=±5%, componentlink1description=Datasheet, componentlink1url=http://www.vishay.com/docs/20037/rcae3.pdf, componentlink2description="DigiKey Link", componentlink2url=https://www.digikey.com/en/products/detail/vishay-dale/RCA0603100KJNEA/4946784, Composition="Thick Film", Features="Anti-Sulfur, Automotive AEC-Q200", Height - Seated (Max)="0.020\" (0.50mm)", lastupdated="2/9/2024 8:42:20 PM", Lifecycle Status=Active, Minimum Order=1, Number of Terminations=2, Package / Case="0603 (1608 Metric)", packaging=TapeAndReel, Part Number=RCA0603100KJNEA, Part Status=Active, partid=23468, Price=0.01, Resistance="100 kOhms", series=RCA, Size / Dimension="0.061\" L x 0.033\" W (1.55mm x 0.85mm)", Supplier 1=DigiKey
R9: library part TNPU060310K0BZEN00, "RES SMD 10K OHM 0.1% 1/10W 0603", Device Package="0603 (1608 Metric)", Manufacturer="Vishay Dale", Operating Temperature="-55°C ~ 125°C", Power (Watts)="0.1W, 1/10W", Ratings=AEC-Q200, Supplier Device Package=0603, Supplier Part Number 1=TNPU10.0KBACT-ND, Temperature Coefficient=±5ppm/°C, Tolerance=±0.1%, componentlink1description=Datasheet, componentlink1url=http://www.vishay.com/docs/28779/tnpue3.pdf, componentlink2description="DigiKey Link", componentlink2url=https://www.digikey.com/en/products/detail/vishay-dale/TNPU060310K0BZEN00/2238348, Composition="Thin Film", Features="Anti-Sulfur, Automotive AEC-Q200, Moisture Resistant", Height - Seated (Max)="0.022\" (0.55mm)", lastupdated="2/9/2024 8:43:27 PM", Lifecycle Status=Active, Minimum Order=1, Number of Terminations=2, Package / Case="0603 (1608 Metric)", packaging=TapeAndReel, Part Number=TNPU060310K0BZEN00, Part Status=Active, partid=7183, Price=0.88, Resistance="10 kOhms", series="TNPU e3", Size / Dimension="0.063\" L x 0.033\" W (1.60mm x 0.85mm)", Supplier 1=DigiKey
R10: library part RT0603CRD07680RL, "RES SMD 680 OHM 0.25% 1/10W 0603", Device Package="0603 (1608 Metric)", Manufacturer=Yageo, Operating Temperature="-55°C ~ 155°C", Power (Watts)="0.1W, 1/10W", Supplier Device Package=0603, Supplier Part Number 1=YAG4792CT-ND, Temperature Coefficient=±25ppm/°C, Tolerance=±0.25%, componentlink1description=Datasheet, componentlink1url=https://www.yageo.com/upload/media/product/productsearch/datasheet/rchip/PYu-RT_1-to-0.01_RoHS_L_11.pdf, componentlink2description="DigiKey Link", componentlink2url=http://digikey.com/product-detail/en/yageo/RT0603CRD07680RL/YAG4792CT-ND/6616948, Composition="Thin Film", Height - Seated (Max)="0.022\" (0.55mm)", lastupdated="2/9/2024 8:42:46 PM", Lifecycle Status=Active, Minimum Order=1, Number of Terminations=2, Package / Case="0603 (1608 Metric)", packaging=TapeAndReel, Part Number=RT0603CRD07680RL, Part Status=Active, partid=17637, Price=0.07, Resistance="680 Ohms", series=RT, Size / Dimension="0.063\" L x 0.031\" W (1.60mm x 0.80mm)", Supplier 1=DigiKey
R13: library part RN73R1JTTD1001B25, "RES 1K OHM 0.1% 1/10W 0603", Device Package="0603 (1608 Metric)", Manufacturer="KOA Speer Electronics, Inc.", Operating Temperature="-55°C ~ 155°C", Power (Watts)="0.1W, 1/10W", Ratings=AEC-Q200, Supplier Device Package=0603, Supplier Part Number 1=2019-RN73R1JTTD1001B25CT-ND, Temperature Coefficient=±25ppm/°C, Tolerance=±0.1%, componentlink1description=Datasheet, componentlink1url=//media.digikey.com/pdf/Data%20Sheets/KOA%20Speer/RN73R_Type_DS.pdf, componentlink2description="DigiKey Link", componentlink2url=https://www.digikey.com/en/products/detail/koa-speer-electronics-inc/RN73R1JTTD1001B25/9991865, Composition="Thin Film", Features="Automotive AEC-Q200, Moisture Resistant", Height - Seated (Max)="0.022\" (0.55mm)", lastupdated="2/9/2024 8:43:22 PM", Lifecycle Status=Active, Minimum Order=1, Number of Terminations=2, Package / Case="0603 (1608 Metric)", packaging=TapeAndReel, Part Number=RN73R1JTTD1001B25, Part Status=Active, partid=8387, Price=0.05, Resistance="1 kOhms", series=RN73R, Size / Dimension="0.063\" L x 0.031\" W (1.60mm x 0.80mm)", Supplier 1=DigiKey
U: "Buck Switching Regulator IC Positive Adjustable 0.8V 1 Output 1A SOT-23-6 Thin, TSOT-23-6", Package="SOT-23 Texas Instruments", Availability=Unavailable, MF="Texas Instruments", MP=LM2734YMK, Price=None, SnapEDA_Link=https://www.snapeda.com/parts/LM2734YMK/Texas%20Instruments/view-part/105783/?ref=snap
U1 U2: "Floating channel designed for bootstrap operation", Package="SOIC-8 International Rectifier", Availability=Warning, Check_prices=https://www.snapeda.com/parts/IR2104SPBF/Infineon%20Technologies/view-part/61964/?ref=eda, MF=Infineon, MP=IR2104SPBF, Price=None, Purchase-URL=https://pricing.snapeda.com/search/part/IR2104SPBF/?ref=eda, SnapEDA_Link=https://www.snapeda.com/parts/IR2104SPBF/Infineon%20Technologies/view-part/61964/?ref=snap
?: "Linear Voltage Regulator IC 1 Output 250mA SOT-23-3", Package="SOT-23-3 Microchip", Availability=Unavailable, MF=Microchip, MP=MCP1700T-3302E/TT, Price=None, SnapEDA_Link=https://www.snapeda.com/parts/MCP1700T-3302E/TT/Microchip/view-part/50877/?ref=snap

## Free pads (board coordinates)
  round 236.22 hole 122.05: 9(140,140) 9(140,2350) 9(1580,140) 9(1580,2350)

## Via types
v1: diameter 19.68, hole 11.81, Top Layer to Bottom Layer, 344 vias
v2: diameter 31.5, hole 19.68, Top Layer to Bottom Layer, tented both sides, 7 vias
v3: diameter 31.5, hole 19.68, Top Layer to Bottom Layer, 4 vias
v4: diameter 19.68, hole 11.81, Top Layer to Bottom Layer, tented both sides, 1 vias

## Nets (pads, with @x,y where several pads share a name; then routed paths per layer and width w, separated by ;. In a path a pad name is that pad's centre, name@x,y a point inside that pad or via, vN(x,y) a via of type N, cw(c..) or ccw(c..) an arc to the next point about the centre after c; other vN are vias at no path point)
+3.3: ?.2 C12.2 Q6.1 Q7.1 R3.2 R10.2 R15.2 | length 776.2
  Top Layer w10: v2(1380,1420) 1420,1380 v2(1490,1380) 1570,1380 1591.44,1401.44 C12.2
  Bottom Layer w10: Q7.1 1410.6,1537.99 1422.41,1526.18 R15.2 1426.35,1526.18 1490,1462.53 v2(1490,1380) ; v2(1380,1420) 1350,1420 1327.46,1397.46 Q6.1 1410.6,1366.71 1422.41,1354.9 R3.2
+5: ?.3 C6.2 C9.2 C10.2 C11.2 L1.2 R6.2 R7.2 R13.2 R16.2 | length 1223.8
  Bottom Layer w10: R6.2 1176.35,1380.49 1188.08,1392.22 1188.08,1437.68 1176.35,1449.41 R16.2 1203.51,1449.41 1207.05,1452.95 1244.79,1452.95 1285,1493.16 1285,1644.14 1290.86,1650 v1(1500,1650) ; R7.2 1392.98,2118.17 1576.83,2118.17 1675,2020 v1(1675,1700)
  other v1: 1600,1650 1425,1700 1475,1700 1625,1700
+12: C2.1 C3.1 C5.1 C8.2 D1.1 D2.1 D3.2 D4.2 D8.1 J1.1 Q1.2 Q3.2 R8.2 U1.1 U1.3 U2.1 U2.3 U.5 | length 1853.2
  Top Layer w10: U.5 U.5@1230,1987.5
  Top Layer w15: U2.1 U2.1@1185,677.5 ; U1.3 1285,342 1262.5,364.5 1207.5,364.5 1185,342 U1.1 1157,313 1090,380 1090,665 1167.5,665 1182.5,680 U2.1@1185,677.5 ; U2.3 1285,692 1262.5,714.5 1207.5,714.5 1185,692 U2.1@1185,677.5
  Bottom Layer w15: v1(1000,1550) 1000,1355 1150,1205 1150,975 1090,915 1090,797.61 1100.75,786.86 v3(1100.75,665)
  other v1: 100,1550 150,1550 200,1550 250,1550 300,1550 350,1550 400,1550 450,1550 500,1550 550,1550 600,1550 650,1550 700,1550 750,1550 800,1550 850,1550 900,1550 950,1550 125,1600 175,1600 225,1600 275,1600 325,1600 375,1600 425,1600 475,1600 525,1600 575,1600 625,1600 675,1600 725,1600 775,1600 825,1600 875,1600 925,1600 975,1600 1025,1600 1025,1700 1025,1800 1025,1900 300,2050 350,2050 400,2050 450,2050 500,2050 550,2050 600,2050 325,2100 375,2100 425,2100 475,2100 525,2100 575,2100 350,2150 400,2150 450,2150 500,2150 550,2150 600,2150 325,2200 375,2200 425,2200 475,2200 525,2200 575,2200 350,2250 400,2250 450,2250 500,2250 550,2250 600,2250 325,2300 375,2300 425,2300 575,2300 350,2350 400,2350 600,2350 850,2350 325,2400 375,2400 425,2400 475,2400 525,2400 575,2400 625,2400 825,2400 875,2400 925,2400 975,2400 1025,2400 350,2450 400,2450 450,2450 500,2450 550,2450 600,2450 650,2450 700,2450 750,2450 800,2450 850,2450 900,2450 950,2450 1000,2450
GND: ?.1 C2.2 C3.2 C5.2 C8.1 C9.1 C10.1 C11.1 C12.1 D5.1 D6.1 D7.1 D9.2 D11.2 H1.3 J1.2 Q2.3 Q4.3 R9.1 U1.4 U2.4 U.2
  other v1: 1100,100 1200,100 1300,100 1400,100 1150,200 1350,200 1450,200 1100,300 1400,300 1500,300 1600,300 1150,400 1350,400 1450,400 1550,400 1650,400 1500,500 1600,500 1150,600 1450,600 1550,600 1650,600 1500,700 1600,700 1315,735 1150.59,800 1450,800 1650,800 1600,900 150,1000 250,1000 750,1000 850,1000 1450,1000 1650,1000 100,1100 300,1100 800,1100 1600,1100 750,1200 1650,1200 100,1300 300,1300 1500,1300 1600,1300 1250,1600 1200,1700 1150,1800 1350,1800 1450,1800 1550,1800 1650,1800 1400,1900 1050,2000 1650,2000 100,2100 200,2100 800,2100 1000,2100 1200,2150 150,2200 250,2200 650,2200 750,2200 850,2200 950,2200 1550,2200 1650,2200 800,2300 1100,2300 1400,2300 1150,2400 1250,2400 1350,2400 1450,2400
NetC1_2: C1.2 D2.2 U2.8 | length 1313.4
  Top Layer w10: v2(1156.5,860) 1182,860 U2.8 1190,862 1190,975 1280,1065 1280,1134.61 1231.58,1183.03 C1.2
  Bottom Layer w10: D2.2 1167.01,1670 1167.01,1542.79 1125,1500.79 1125,1307.9 1205,1227.9 1205,1036.41 1205.75,1035.67 1205.75,1014.33 1205,1013.59 1205,908.5 v2(1156.5,860)
NetC4_2: C4.2 D1.2 U1.8 | length 1519.7
  Top Layer w10: v2(1150,500) 1180,500 1185,505 U1.8 U1.8@1185,536 ; v4(1180,1015) 1231.58,1066.58 C4.2
  Bottom Layer w10: v2(1150,500) 1130.16,519.84 1130.16,648.74 1130.75,649.33 1130.75,882.16 1180,931.41 v4(1180,1015) 1180,1231.69 1110,1301.69 1110,1690 1152.01,1732.01 D1.2
NetC6_1: C6.1 R7.1 R9.2 U.3 | length 382.9
  Top Layer w10: v2(1144.79,2076.21) 1155,2066 U.3
  Bottom Layer w10: v2(1144.79,2076.21) 1155,2066 R9.2 R7.1 1392,2065.02 C6.1
NetC7_1: C7.1 D6.2 L1.1 U.6
NetC7_2: C7.2 D8.2 U.1 | length 423.4
  Top Layer w10: U.1 1267,2050 C7.2 1497.34,2084.05 1503.2,2089.91 1525.77,2089.91 1560.36,2124.5 1615.86,2124.5 D8.2
NetD9_1: D9.1 R10.1 | length 70.8
  Top Layer w15: D9.1 R10.1
NetD11_1: D11.1 R13.1 | length 91.9
  Top Layer w10: D11.1 1304.14,1635.14 1310,1629.28 1310,1615.86 1325.86,1600 1333.94,1600 1349.53,1584.41 R13.1
NetQ1_1: Q1.1 R2.1 | length 666
  Top Layer w5: Q1.1 714.15,1368.9 817.75,1472.5 1013.36,1472.5 1037.25,1472.5 1067.5,1442.25 1067.5,1418.36 1067.5,1347.5 1083.04,1331.96 R2.1
NetQ2_1: Q2.1 R5.1 | length 867.4
  Top Layer w5: Q2.1 812.06,1187.94 797.5,1202.5 797.5,1438.11 821.89,1462.5 938.36,1462.5 1009.22,1462.5 1033.11,1462.5 1057.5,1438.11 1057.5,1414.22 1057.5,1307.5 1107.06,1257.94 R5.1
NetQ3_1: Q3.1 R1.2 | length 1060.1
  Top Layer w5: Q3.1 195.37,1403.68 233.82,1442.13 312.38,1442.13 362.75,1492.5 1166.91,1492.5 R1.2
NetQ4_1: Q4.1 R4.2 | length 1225.6
  Top Layer w5: Q4.1 395.37,1265.44 388.31,1272.5 346.89,1272.5 322.5,1296.89 322.5,1438.11 366.89,1482.5 1041.39,1482.5 1077.5,1446.39 1077.5,1422.5 1094.02,1405.98 R4.2
NetR1_1: R1.1 U1.7 | length 1291.7
  Top Layer w10: R1.1 1230.59,1478.03 1385,1323.62 1385,470 1355,440 1255,440 1235,460 U1.7
NetR2_2: R2.2 U2.7 | length 782
  Top Layer w10: R2.2 1230.59,1329.99 1355,1205.59 1355,788.65 1341.36,775 1270,775 1235,810 U2.7
NetR4_1: R4.1 U1.5 | length 971.2
  Top Layer w10: R4.1 1240.63,1395.94 1240.63,1379.37 1370,1250 1370,571 1335,536 U1.5
NetR5_2: R5.2 U2.5 | length 444.2
  Top Layer w10: R5.2 1230.59,1255.97 1335,1151.56 U2.5
NetR8_1: R8.1 U.4 | length 63
  Top Layer w10: R8.1 U.4
OUT1: C4.1 D4.1 D7.2 J2.2 Q3.3 Q4.2 U1.6 | length 2670.7
  Top Layer w10: v3(1075,970) 1072.5,967.5 1072.5,177.5 1095,155 1345,155 1375,185 1375,336.14 1336.14,375 1335,375 1320,390 1255,390 1210,435 1210,553.39 1215.86,559.25 1275.32,559.25 1281.18,553.39 1281.18,510.82 U1.6 ; v3(1075,1110) C4.1
  Bottom Layer w10: D4.1 486.67,1251.67 510,1275 785,1275 950,1110 v3(1075,1110) v3(1075,970)
  other v1: 350,50 400,50 450,50 500,50 550,50 600,50 325,100 375,100 425,100 475,100 525,100 575,100 625,100 300,150 350,150 400,150 450,150 600,150 325,200 375,200 425,200 625,200 300,250 350,250 400,250 450,250 500,250 550,250 125,300 175,300 225,300 275,300 325,300 375,300 425,300 475,300 525,300 100,350 150,350 200,350 250,350 300,350 350,350 400,350 450,350 500,350 125,400 175,400 225,400 275,400 325,400 375,400 425,400 475,400 100,450 150,450 200,450 250,450 300,450 350,450 400,450 450,450 500,450 125,500 175,500 225,500 275,500 325,500 375,500 425,500 475,500
OUT2: C1.1 D3.1 D5.2 J2.1 Q1.3 Q2.2 U2.6 | length 992.1
  Top Layer w10: C1.1 v3(1015,1185) 1015,1095 1115,995 1115,765.86 1120.86,760 1204.14,760 1210,765.86 1210,899.14 1230.86,920 1265,920 1280,905 1280,862 U2.6
  other v1: 700,50 750,50 800,50 850,50 900,50 950,50 1000,50 675,100 725,100 775,100 825,100 875,100 925,100 975,100 1025,100 800,150 850,150 900,150 950,150 1000,150 825,200 875,200 925,200 975,200 1025,200 650,250 700,250 750,250 800,250 850,250 900,250 950,250 1000,250 625,300 675,300 725,300 775,300 825,300 875,300 925,300 975,300 1025,300 550,350 600,350 650,350 700,350 750,350 800,350 850,350 900,350 950,350 1000,350 575,400 625,400 675,400 725,400 775,400 825,400 875,400 925,400 975,400 1025,400 550,450 600,450 650,450 700,450 750,450 800,450 850,450 900,450 950,450 1000,450 575,500 625,500 675,500 725,500 775,500 825,500 875,500 925,500 975,500 1025,500 1025,600 1025,700 1025,800 1025,900
PWM1: Q6.3 R6.1 U1.2 | length 1266.5
  Top Layer w10: U1.2 1235,240.82 1245,230.82 v2(1245,225)
  Bottom Layer w10: R6.1 Q6.3 1243.99,226.01 v2(1245,225)
PWM1_Sig: H1.1 Q6.2 R3.1 | length 312.2
  Bottom Layer w10: Q6.2 1339.86,1291.91 1351.67,1303.72 R3.1 1424.38,1235.62 H1.1
PWM2: Q7.3 R16.1 U2.2 | length 1130.3
  Top Layer w10: v2(1215,585) 1235,605 U2.2
  Bottom Layer w10: v2(1215,585) 1215,590.82 1225,600.82 1225,1229.12 1145.68,1308.44 1145.68,1470.29 1151.54,1476.14 1168.52,1476.14 1174.38,1482 R16.1 Q7.3
PWM2_Sig: H1.2 Q7.2 R15.1 | length 617.9
  Bottom Layer w10: Q7.2 1410.6,1463.19 1422.41,1475 R15.1 1424.38,1404.48 1566.5,1262.36 1566.5,1076.5 H1.2

## Polygon pours and split planes (outlines as drawn)
GND on Top Layer "GND_L01_P000" (solid, pour order 0): 0,0 1720,0 1720,2495 0,2495
GND on Bottom Layer "GND_L02_P001" (solid, pour order 1): 0,0 1720,0 1720,2495 0,2495

## Keep-outs
Keep-Out Layer:
  lines w10: 0,0 0,2495 1720,2495 1720,0 0,0

## Other copper
Top Layer:
  region net +12: 620,2050 620,2360 660,2400 800,2400 840,2360 840,2300 870,2270 1020,2270 1050,2300 1050,2440 1010,2480 620,2480 340,2480 300,2440 300,2090 260,2050 90,2050 50,2010 50,1540 90,1500 1010,1500 1050,1540 1050,1840 1070,1860 1290,1860 1300,1870 1300,1925 1290,1935 1255,1935 1245,1945 1245,2010 1225,2030 1135,2030 1120,2045 1120,2185.1 1464.9,2185.1 1475,2175 1475,2110 1485,2100 1510.05,2100 1520.91,2110.98 1519.94,2205.36 1474.85,2250 1470.86,2250 1110,2250 1050,2190 1050,2030 1070,2010 1207.33,2010 1215,2002.32 1215,1945 1205,1935 1085,1935 1050,1970 1010,2010 660,2010
  region net +3.3: 1575,1590 1625,1590 1635,1580 1635,1510 1695,1510 1705,1500 1705,1455 1695,1445 1645,1445 1625,1425 1575,1425 1565,1435 1565,1445 1565,1580
  region net +5: 1705,1620 1705,1765 1695,1775 1330,1775 1320,1765 1320,1620 1330,1610 1695,1610
  region net NetC7_1: 1250,2005 1250,1950 1255,1945 1470,1945 1500,1915 1605,1915 1630,1945 1630,1985 1595,2020 1595,2075 1585,2085 1535,2085 1525,2075 1525,2020 1515,2010 1255,2010
  region net OUT1: 240,280 90,280 50,320 50,920 90,960 410,960 450,1000 450,1265 435,1280 350,1280 330,1300 330,1435 350,1455 555,1455 580,1430 580,970 530,920 530,340 640,220 640,60 600,20 320,20 280,60 280,240
  region net OUT2: 540,920 540,340 650,220 650,70 700,20 1000,20 1050,70 1050,960 1050,1435 1030,1455 925,1455 825,1455 805,1435 805,1305 830,1280 910,1280 925,1265 925,985 900,960 580,960
Bottom Layer:
  region net +5: 1705,1620 1705,1765 1695,1775 1330,1775 1320,1765 1320,1620 1330,1610 1695,1610
  region net OUT2: 550,965 540,955 540,340 650,220 650,70 700,20 1000,20 1050,70 1050,920 1010,960 720,960 700,980 700,1225 685,1240 560,1240 550,1230
  region net OUT1: 240,280 90,280 50,320 50,920 90,960 345,960 365,980 365,1230 375,1240 505,1240 515,1230 515,970 530,955 530,340 640,220 640,60 600,20 320,20 280,60 280,240
  region net +12: 620,2050 620,2360 660,2400 800,2400 840,2360 840,2300 870,2270 1020,2270 1050,2300 1050,2440 1010,2480 620,2480 340,2480 300,2440 300,2090 260,2050 90,2050 50,2010 50,1540 90,1500 440,1500 460,1480 460,1310 470,1300 595,1300 605,1310 605,1480 625,1500 740,1500 800,1500 1010,1500 1050,1540 1050,1970 1010,2010 660,2010